# EAGLE board prismino (EAGLE 6.5.0)
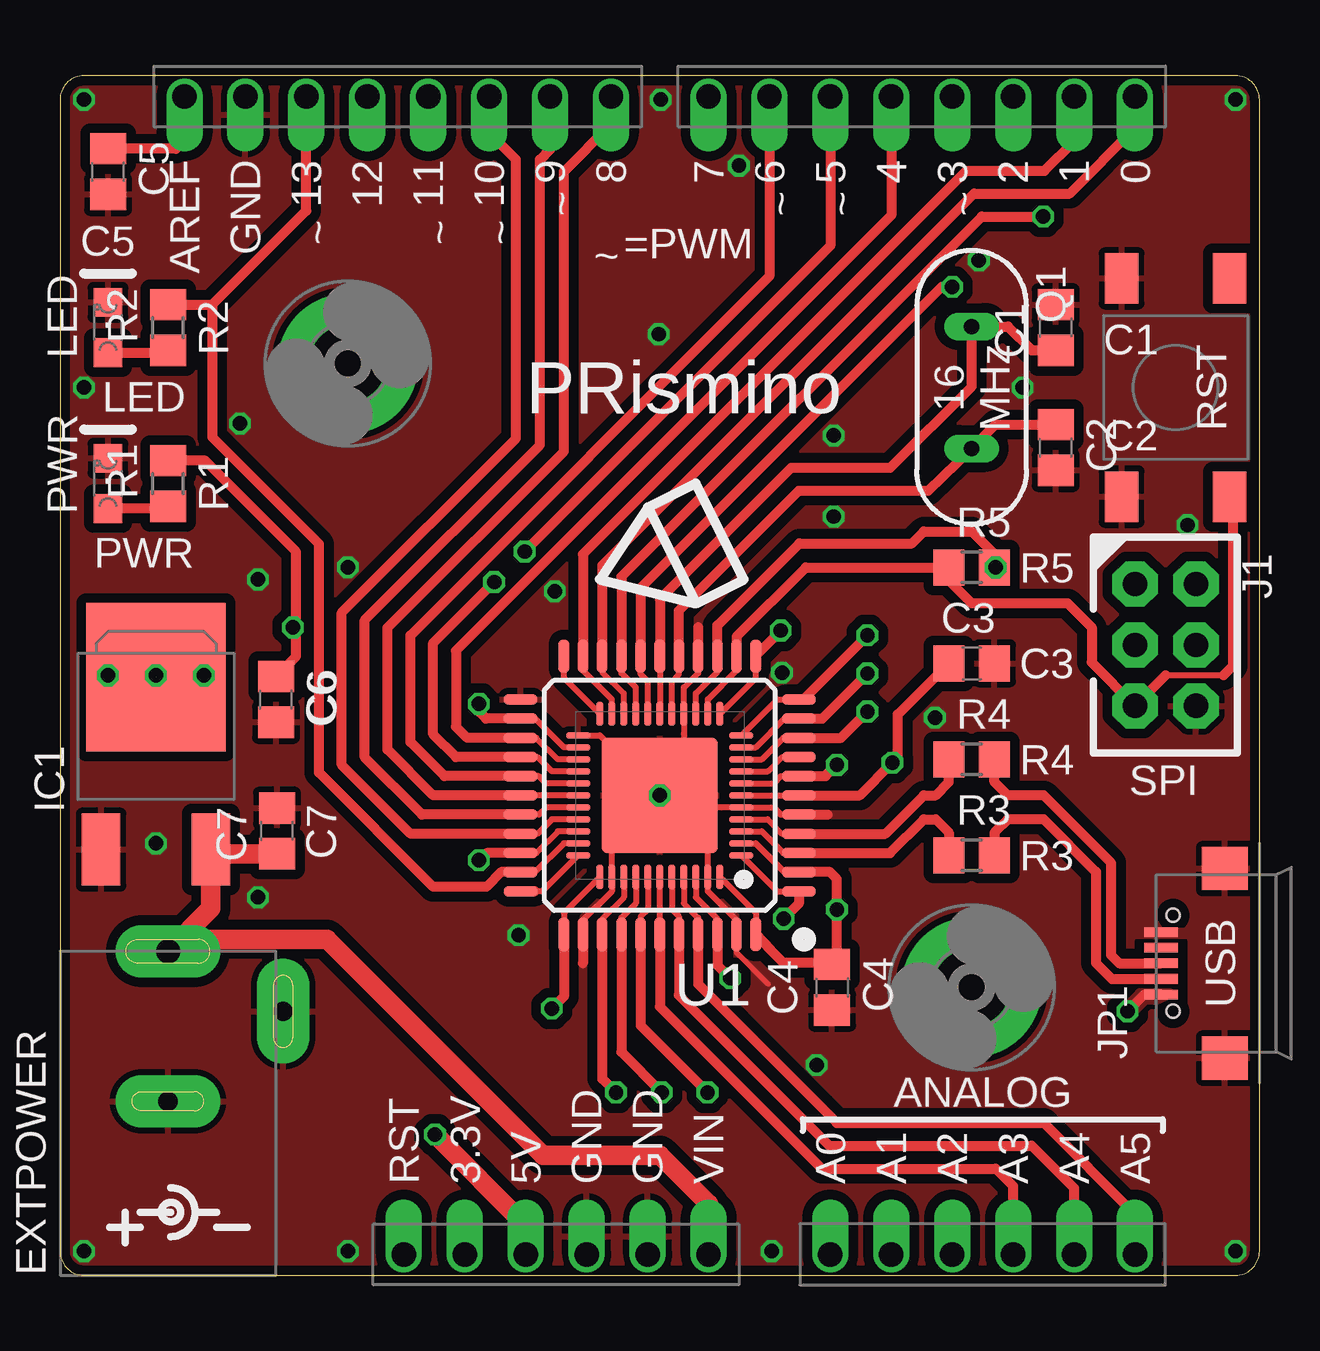
[diagram p0: board, top side]
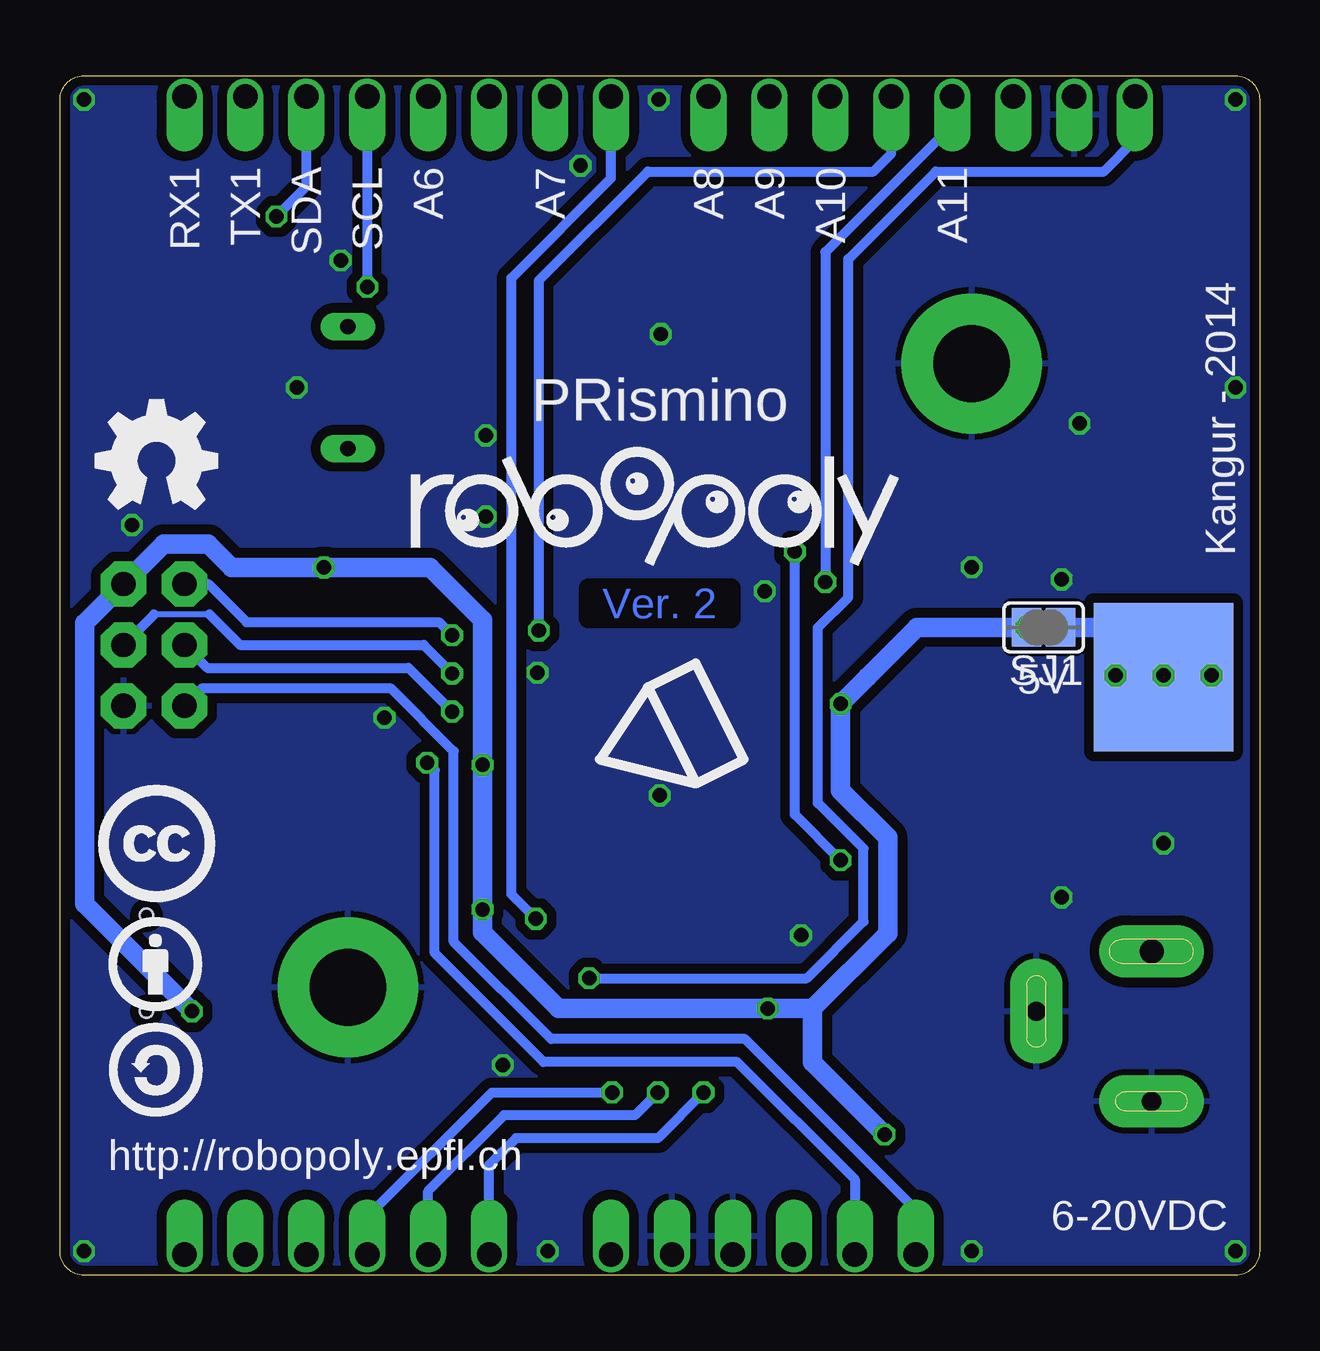
[diagram p1: board, bottom side, seen from below]

Size 50 x 50 mm. Coordinates in mm from the lower left corner, seen from the top.
Outline: 0,49 0,1 arc90 1,0 49,0 arc90 50,1 50,49 arc90 49,50 1,50 arc90 0,49
Copper layers (1*16): Top 0.035mm / dielectric 1.5mm / Bottom 0.035mm
Design rules "Fusion_eagle_rule_v1.1 *": minimum track width 6mil, minimum drill 12mil, track to track 6mil, track to pad 6mil, pad to pad 6mil, via to via 6mil, smd to smd 0mil, copper to edge 4mil, drill to drill 10mil, minimum pad ring 10mil, minimum via ring 6mil, stop-mask expansion 2mil, vias tented up to drill 100mil, thermal gap 10mil
Net classes: 2 gnd: width 0.254 mm, drill 0.61 mm, clearance 0.254 mm

## Footprints (pad centres in the part's own frame; a part is rotated, then mirrored left to right if it is on the bottom)
BUTTON = smd 1.4 x 2.1: 1 2.25,4.55; 2 2.25,-4.55; 3 -2.25,4.55; 4 -2.25,-4.55
C0805 = smd 1.3 x 1.5: 1 -0.95,0; 2 0.95,0
4UCON-18741 = drill 1 pad 2.184 long: 1 13.5,0 | drill 0.8 pad 2.184 long: 2 11,-4.8; 3 7.25,0
3,2-PAD = drill 3.2 pad 5.842: B3,2 0,0
DPACK_3 = smd 1.6 x 3: 1 -2.285,-4.08; 3 2.285,-4.08 | smd 5.8 x 6.2 bottom: HEATSINK 0,3.1 | smd 5.8 x 6.2: PAD 0,3.1
2X3-NOSILK-STACK = drill 1.016 pad 1.88 octagon: 1 -2.54,-1.27; 2 -2.54,1.27; 3 0,-1.27; 4 0,1.27; 5 2.54,-1.27; 6 2.54,1.27
USB-MICROB-4UCON = smd 0.4 x 1.4: D+ 0,4.1; D- -0.65,4.1; GND@1 1.3,4.1; ID 0.65,4.1; VBUS -1.3,4.1 | smd 1.8 x 1.9: GND@4 -3.95,1.45; GND@5 3.95,1.45 | hole 0.55: -2,3.6; 2,3.6
CHIPLED_0805 = smd 1.2 x 1.2: A 0,-1.05; C 0,1.05
ARDUINO-SMALL = drill 1.016 offset: 1 -10.668,-24.13; 2 -8.128,-24.13; 3 -5.588,-24.13; 4 -3.048,-24.13; 5 -0.508,-24.13; 6 2.032,-24.13; 7 7.112,-24.13; 8 9.652,-24.13; 9 12.192,-24.13; 10 14.732,-24.13; 11 17.272,-24.13; 12 19.812,-24.13; 13 19.812,24.13; 14 17.272,24.13; 15 14.732,24.13; 16 12.192,24.13; 17 9.652,24.13; 18 7.112,24.13; 19 4.572,24.13; 20 2.032,24.13; 21 -2.032,24.13; 22 -4.572,24.13; 23 -7.112,24.13; 24 -9.652,24.13; 25 -12.192,24.13; 26 -14.732,24.13; 27 -17.272,24.13; 28 -19.812,24.13
QS = drill 0.635 long: 1 -2.54,0; 2 2.54,0
R0805 = smd 1.3 x 1.5: 1 -0.95,0; 2 0.95,0
SJ = smd 1.219 x 1.6: 1 -0.711,0; 2 0.711,0
TQFP-44 = smd 1.4 x 0.45: 1 -5.8,4; 2 -5.8,3.2; 3 -5.8,2.4; 4 -5.8,1.6; 5 -5.8,0.8; 6 -5.8,0; 7 -5.8,-0.8; 8 -5.8,-1.6; 9 -5.8,-2.4; 10 -5.8,-3.2; 11 -5.8,-4; 23 5.8,-4; 24 5.8,-3.2; 25 5.8,-2.4; 26 5.8,-1.6; 27 5.8,-0.8; 28 5.8,0; 29 5.8,0.8; 30 5.8,1.6; 31 5.8,2.4; 32 5.8,3.2; 33 5.8,4 | smd 0.45 x 1.4: 12 -4,-5.8; 13 -3.2,-5.8; 14 -2.4,-5.8; 15 -1.6,-5.8; 16 -0.8,-5.8; 17 0,-5.8; 18 0.8,-5.8; 19 1.6,-5.8; 20 2.4,-5.8; 21 3.2,-5.8; 22 4,-5.8; 34 4,5.8; 35 3.2,5.8; 36 2.4,5.8; 37 1.6,5.8; 38 0.8,5.8; 39 0,5.8; 40 -0.8,5.8; 41 -1.6,5.8; 42 -2.4,5.8; 43 -3.2,5.8; 44 -4,5.8 | smd 1 x 0.275: 45 -3.4,2.5; 46 -3.4,2; 47 -3.4,1.5; 48 -3.4,1; 49 -3.4,0.5; 50 -3.4,0; 51 -3.4,-0.5; 52 -3.4,-1; 53 -3.4,-1.5; 54 -3.4,-2; 55 -3.4,-2.5; 67 3.4,-2.5; 68 3.4,-2; 69 3.4,-1.5; 70 3.4,-1; 71 3.4,-0.5; 72 3.4,0; 73 3.4,0.5; 74 3.4,1; 75 3.4,1.5; 76 3.4,2; 77 3.4,2.5 | smd 0.275 x 1: 56 -2.5,-3.4; 57 -2,-3.4; 58 -1.5,-3.4; 59 -1,-3.4; 60 -0.5,-3.4; 61 0,-3.4; 62 0.5,-3.4; 63 1,-3.4; 64 1.5,-3.4; 65 2,-3.4; 66 2.5,-3.4; 78 2.5,3.4; 79 2,3.4; 80 1.5,3.4; 81 1,3.4; 82 0.5,3.4; 83 0,3.4; 84 -0.5,3.4; 85 -1,3.4; 86 -1.5,3.4; 87 -2,3.4; 88 -2.5,3.4 | smd 4.826 x 4.826: EXP 0,0

## Placement (x,y rotation side)
BTN1  BUTTON  [BUTTON]  46.5,37 180 top
BY1  BYBOTTOM  [BY]  46,13 0 top
C1  22pF  [C0805]  41.5,39.5 90 top
C2  22pF  [C0805]  41.5,34.5 270 top
C3  1uF  [C0805]  38,25.5 0 top
C4  100nF  [C0805]  32.18,12 270 top
C5  100nF  [C0805]  2,46 270 top
C6  10uF  [C0805]  9,24 270 top
C7  10uF  [C0805]  9.04,18.52 90 top
EXTPOWER  4UCON-18741  [4UCON-18741]  4.5,0 90 top
H1  MOUNT-PAD-ROUND3.2  [3,2-PAD]  38,12 0 top
H2  MOUNT-PAD-ROUND3.2  [3,2-PAD]  12,38 0 top
IC1  NCP1117DT05BDTRKG  [DPACK_3]  4,21.82 0 top
J1  ISP-6PIN  [2X3-NOSILK-STACK]  46.08,26.27 270 top
JP1  USB4UCON  [USB-MICROB-4UCON]  50,13 90 top
LED  [CHIPLED_0805]  2,39.5 0 top
LICENCE1  LICENCECC-BOTTOM  [CREATIVE-COMMONS]  46,18 0 top
PIN1  ARDUINO-SMALL  [ARDUINO-SMALL]  25,25 0 top
PWR  [CHIPLED_0805]  2,33 0 top
Q1  16MHz  [QS]  38,37 270 top
R1  1K  [R0805]  4.5,33 90 top
R2  1K  [R0805]  4.5,39.5 90 top
R3  22R  [R0805]  38,17.5 0 top
R4  22R  [R0805]  38,21.5 0 top
R5  10K  [R0805]  38,29.5 0 top
SA1  SABOTTOM  [SA]  46,8.5 0 top
SJ1  [SJ]  9,27 180 bottom
U1  ATMEGA32U4  [TQFP-44]  25,20 180 top
U$1  PRISMINO  [PRISMINO-LOGO]  25,22.5 0 bottom
U$4  ROBOPOLY-LOGOBOTTOM-BIG  [ROBOPOLY-LOGO-BOTTOM-BIG]  25,31.75 0 top
U$5  OPEN-HARDWARE-LOGOBOTTOM-SMALL  [OPEN-HARDWARE-BOTTOM-SMALL]  46,34 0 top
U$7  PRISMINO  [PRISMINO-LOGO]  25,30 0 top

## Library data of the parts
BTN1 BY1 EXTPOWER H1 H2 IC1 J1 JP1 LICENCE1 PIN1 Q1 SA1 SJ1 U1 U$1 U$4 U$5 U$7 = robopoly
C1-C7 R1-R5 = rcl
LED PWR = led

## Nets
3V3: C3.1 PIN1.2 U1.6 U1.50
A0: PIN1.7 U1.36 U1.80
A1: PIN1.8 U1.37 U1.81
A2: PIN1.9 U1.38 U1.82
A3: PIN1.10 U1.39 U1.83
A4: PIN1.11 U1.40 U1.84
A5: PIN1.12 U1.41 U1.85
AREF: C5.1 PIN1.28 U1.42 U1.86
BOOTEN: U1.33 U1.77
D0: PIN1.13 U1.20 U1.64
D1: PIN1.14 U1.21 U1.65
D2: PIN1.15 U1.19 U1.63
D3: PIN1.16 U1.18 U1.62
D4: PIN1.17 U1.25 U1.69
D5: PIN1.18 U1.31 U1.75
D6: PIN1.19 U1.27 U1.71
D7: PIN1.20 U1.1 U1.45
D8: PIN1.21 U1.28 U1.72
D9: PIN1.22 U1.29 U1.73
D10: PIN1.23 U1.30 U1.74
D11: PIN1.24 U1.12 U1.56
D12: PIN1.25 U1.26 U1.70
D13: PIN1.26 R2.2 U1.32 U1.76
DM: R3.1 U1.3 U1.47
DP: R4.1 U1.4 U1.48
GND: BTN1.1 BTN1.2 C1.2 C2.2 C3.2 C4.2 C5.2 C6.2 C7.2 EXTPOWER.2 EXTPOWER.3 H1.B3,2 H2.B3,2 IC1.1 J1.6 JP1.GND@1 JP1.GND@4 JP1.GND@5 LED.C PIN1.4 PIN1.5 PIN1.27 PWR.C U1.5 U1.15 U1.23 U1.35 U1.43 U1.49 U1.59 U1.67 U1.79 U1.87 U1.EXP
MISO: J1.1 U1.11 U1.55
MOSI: J1.4 U1.10 U1.54
N$1: IC1.HEATSINK IC1.PAD SJ1.1
N$3: PWR.A R1.1
N$6: JP1.D- R3.2
N$7: JP1.D+ R4.2
N$11: LED.A R2.1
RESET: BTN1.3 J1.5 PIN1.1 R5.1 U1.13 U1.57
RXLED: U1.8 U1.52
SCK: J1.3 U1.9 U1.53
TXLED: U1.22 U1.66
VCC: C4.1 C6.1 J1.2 JP1.VBUS PIN1.3 R1.2 R5.2 SJ1.2 U1.2 U1.7 U1.14 U1.24 U1.34 U1.44 U1.46 U1.51 U1.58 U1.68 U1.78 U1.88
VIN: C7.1 EXTPOWER.1 IC1.3 PIN1.6
XTAL1: C1.1 Q1.1 U1.17 U1.61
XTAL2: C2.1 Q1.2 U1.16 U1.60

## Tracks (layer width: path | path; a pad name or v marks a point on that pad's centre or on a via)
3V3  (via drill 0.6)
  Top 0.254: U1.50 U1.6
  Top 0.406: U1.6 33.34,20 v34.7,21.36 34.92,21.59 34.92,23.38 C3.1
  Bottom 0.406: v34.7,21.36 34.38,21.05 34.38,13.43 29.84,8.89 21.77,8.89 16.87,3.99 PIN1.2
A0  (via drill 0.6)
  Top 0.254: U1.80 23.5,15.75 22.6,14.85 U1.36
  Top 0.406: 22.61,8.19 v23.18,7.62 22.6,8.2 U1.36
  Bottom 0.406: v23.18,7.62 25.08,5.71 31,5.71 32.11,4.6 PIN1.7
A1  (via drill 0.6)
  Top 0.254: U1.81 24,15.5 23.4,14.9 U1.37
  Top 0.406: 23.4,9.3 v25.08,7.62 | U1.37 23.4,9.3 | 23.4,9.3
  Bottom 0.406: v25.08,7.62 26.04,6.67 31.5,6.67 34.65,3.52 PIN1.8
A2  (via drill 0.6)
  Top 0.254: U1.82 24.5,15.25 24.2,14.95 U1.38
  Top 0.406: v26.99,7.62 24.2,10.41 U1.38
  Bottom 0.406: v26.99,7.62 32,7.62 37.19,2.43 PIN1.9
A3
  Top 0.254: U1.39 U1.83
  Top 0.406: U1.39 25,11.2 31.75,4.45 39,4.45 39.73,3.71 PIN1.10
A4
  Top 0.254: U1.84 25.5,15.25 25.8,14.95 U1.40
  Top 0.406: U1.40 25.8,11.69 25.79,11.68 32.07,5.4 40.5,5.4 42.27,3.63 PIN1.11
A5
  Top 0.254: U1.85 26,15.5 26.6,14.9 U1.41
  Top 0.406: U1.41 26.6,12.13 32.38,6.35 41,6.35 44.81,2.54 PIN1.12
AREF  (via drill 0.6)
  Top 0.254: U1.86 26.5,15.75 27.4,14.85 U1.42
  Top 0.406: 27.39,12.94 27.4,12.92 | 27.4,12.92 v27.94,12.38 | U1.42 27.4,12.92 | C5.1 4.83,46.95 5.19,47.31 PIN1.28
  Bottom 0.406: v27.94,12.38 18.87,12.38 16.51,14.74 16.51,17.78 18.41,19.68 18.41,26.99 17.14,28.26 17.14,42.35 13.5,46 6.5,46 5.19,47.31 PIN1.28
BOOTEN
  Top 0.254: U1.77 20.1,16 19.79,16
  Top 0.406: U1.33 19.79,16
D0
  Top 0.254: U1.64 23.5,24.25 22.6,25.15 U1.20
  Top 0.406: U1.20 22.6,29.59 38.1,45.09 42.09,45.09 44.81,47.81 PIN1.13
D1
  Top 0.254: U1.65 23,24 21.8,25.2 U1.21
  Top 0.406: U1.21 21.8,30.05 37.78,46.04 41.04,46.04 42.27,47.27 PIN1.14
D2  (via drill 0.6)
  Top 0.254: U1.63 24,24.5 23.4,25.1 U1.19
  Top 0.406: 23.4,29.11 38.42,44.13 v40.98,44.13 | 23.4,29.11 | 23.4,29.11 U1.19
  Bottom 0.406: PIN1.15 39.73,45.38 v40.98,44.13
D3  (via drill 0.6)
  Top 0.254: U1.62 24.5,24.75 24.2,25.05 U1.18
  Top 0.406: U1.18 24.2,28.64 36.75,41.19 v37.19,41.19
  Bottom 0.406: PIN1.16 v37.19,41.19
D4
  Top 0.254: U1.69 20.75,21.5 19.85,22.4 U1.25
  Top 0.406: U1.25 16.97,22.4 16.51,22.86 16.51,26.04 34.65,44.18 PIN1.17
D5  (via drill 0.6)
  Top 0.254: U1.75 20.75,18.5 19.85,17.6 U1.31
  Top 0.406: U1.31 17.79,17.6 v17.46,17.3 | v19.37,30.16 32.11,42.91 PIN1.18
  Bottom 0.406: v17.46,17.3 19.37,19.2 v19.37,30.16
D6
  Top 0.254: U1.71 20.25,20.5 19.95,20.8 U1.27
  Top 0.406: U1.27 16.03,20.8 14.61,22.23 14.61,26.67 29.57,41.64 PIN1.19
D7  (via drill 0.6)
  Top 0.254: U1.45 29.9,16 U1.1
  Top 0.406: U1.1 30.8,15.49 v30.16,14.86
  Bottom 0.406: v30.16,14.86 31.18,15.88 31.18,41.57 27.03,45.72 PIN1.20
D8
  Top 0.254: U1.72 U1.28
  Top 0.406: U1.28 15.56,20 13.65,21.91 13.65,26.99 21,34.34 21,46 22.97,47.97 PIN1.21
D9
  Top 0.254: U1.73 20.25,19.5 19.95,19.2 U1.29
  Top 0.406: U1.29 15.09,19.2 12.7,21.59 12.7,27.3 20,34.6 20,46.5 20.43,46.93 PIN1.22
D10
  Top 0.254: U1.74 20.5,19 19.9,18.4 U1.30
  Top 0.406: U1.30 14.94,18.4 | 14.94,18.4 | 14.94,18.4 14.62,18.4 11.75,21.27 11.75,27.62 19,34.88 19,46.5 18.91,46.59 18.25,47.25 17.89,47.61 PIN1.23
D11  (via drill 0.6)
  Top 0.254: U1.56 29,24.9 U1.12
  Top 0.406: v30.05,26.87 29,25.82 U1.12
  Bottom 0.406: v30.05,26.87 30.05,41.45 25.5,46 16.1,46 15.35,46.75 PIN1.24
D12  (via drill 0.6)
  Top 0.254: U1.70 20.5,21 19.9,21.6 U1.26
  Top 0.406: U1.26 16.5,21.6 15.56,22.54 15.56,26.35 v18.1,28.89
  Bottom 0.406: v18.1,28.89 18.1,42.65 12.81,47.94 PIN1.25
D13
  Top 0.254: U1.76 21,18 19.8,16.8 U1.32
  Top 0.406: 6.35,40.45 6.35,34.92 10.79,30.48 10.79,20.95 15.56,16.19 17.78,16.19 18.39,16.8 U1.32 | PIN1.26 10.27,44.37 6.35,40.45 | R2.2 6.35,40.45
DM
  Top 0.254: U1.47 29.25,18.5 30.15,17.6 U1.3
  Top 0.406: U1.3 34.6,17.6 36,19 36.5,19 37.05,18.45 R3.1
DP
  Top 0.254: U1.48 29.5,19 30.1,18.4 U1.4
  Top 0.406: U1.4 34.4,18.4 36,20 36.5,20 37.05,20.55 R4.1
GND  (via drill 0.6)
  Top 0.203: 29.53,12.13 28.19,13.46 28.19,14.22
  Top 0.254: U1.43 28.2,14.8 27,16 U1.87 27,18 U1.EXP | U1.5 30.05,19.2 29.75,19.5 U1.49 25.5,19.5 U1.EXP | U1.35 21.8,14.8 23,16 U1.79 23,18 U1.EXP | U1.15 26.6,25.1 26,24.5 U1.59 26,21 U1.EXP | U1.67 22.5,22.5 U1.EXP
  Top 0.406: 21.8,14 21.8,13 | 31,19.2 32,19.2 | 26.6,27 26.6,26
  other vias: 25.04,49 32.25,35 19.11,14.17 24.96,39.23 36.47,23.24 1,37 1,1 12,1 1,49 7.5,35.5 12,29.51 49,1 49,49 38.3,42.3 47,31.27 25,20 29.66,1 32.25,31.62 20.62,28.51 30.1,25.12 40.12,37 31.54,8.76 4,18 28.3,46.25 8.25,29 8.25,15.75
  pour Top (isolate 0.406): 49,0 1,0 arc-90 0,1 0,49 arc-90 1,50 49,50 arc-90 50,49 50,1 arc-90
  pour Bottom (isolate 0.406): 49,0 1,0 arc-90 0,1 0,49 arc-90 1,50 49,50 arc-90 50,49 50,1 arc-90
  pour Top (no thermals): 47,14.38 47,14.12 44.75,14.12 44.75,15 45.5,15 45.62,14.75 45.88,14.38
MISO  (via drill 0.6)
  Top 0.254: U1.55 29.9,24 U1.11
  Top 0.406: U1.11 30.98,24 v33.66,26.67
  Bottom 0.406: v33.66,26.67 34.21,27.22 42.22,27.22 43.81,28.81 J1.1
MOSI  (via drill 0.6)
  Top 0.254: U1.54 29,22 30.2,23.2 U1.10
  Top 0.406: U1.10 31.77,23.2 v33.66,25.08
  Bottom 0.254: 43.77,27.54 46.08,27.54
  Bottom 0.406: v33.66,25.08 34.84,26.27 42.5,26.27 43.77,27.54 | J1.4 46.08,27.54
N$1  (1 unrouted)
  Bottom 0.813: SJ1.1 6.08,27 IC1.PAD
N$2  (via drill 0.6)
  other vias: 2,25
N$3
  Top 0.406: R1.1 4.4,31.95 PWR.A
N$4  (via drill 0.6)
  other vias: 4,25
N$5  (via drill 0.6)
  other vias: 6,25
N$6
  Top 0.406: JP1.D- 43.85,12.35 43.18,13.02 43.18,16.82 41,19 39.5,19 38.95,18.45 R3.2
N$7
  Top 0.406: JP1.D+ 44.15,13 43.81,13.34 43.81,17.18 41,20 39.5,20 38.95,20.55 R4.2
N$11
  Top 0.406: LED.A 4.5,38.45 R2.1
RESET
  Top 0.254: 48.49,25 46.08,25 | U1.57 27,24 28.2,25.2 U1.13
  Top 0.406: 48.49,25 48.9,25.4 48.9,32.3 BTN1.3 | 46.08,25 J1.5 43,25.54 43,27 42,28 38,28 37.05,28.95 R5.1 31.09,29.5 28.2,26.61 U1.13
  Bottom 0.406: PIN1.1 14.33,2.72 21.45,9.84 29.53,9.84 33.59,13.9 33.59,21.84 36.2,24.45 44.09,24.45 J1.5
RXLED
  Top 0.254: U1.52 29.5,21 30.1,21.6 U1.8
SCK  (via drill 0.6)
  Top 0.254: U1.53 29.25,21.5 30.15,22.4 U1.9
  Top 0.406: U1.9 32.56,22.4 v33.66,23.5
  Bottom 0.406: v33.66,23.5 35.48,25.32 43.86,25.32 J1.3
TXLED
  Top 0.254: U1.66 21,24.9 U1.22
VCC  (via drill 0.6)
  Top 0.254: U1.88 29,15.1 U1.44 | U1.2 30.2,16.8 29,18 U1.46 28.99,18 30.16,16.83 30.8,16.83 | U1.78 21,15.1 U1.34 | U1.24 19.8,23.2 21,22 U1.68 | U1.58 26.5,24.25 27.4,25.15 U1.14 | U1.51 29.75,20.5 30.05,20.8 U1.7
  Top 0.406: 38.95,29.95 R5.2 | R5.2 38.95,30.05 38,31 36,31 35.5,30.5 30.82,30.5 27.4,27.08 U1.14 | U1.24 17.76,23.2 17.46,23.5 v17.46,23.81 | 29,14.18 U1.44 29.64,13.54 30.16,13.02 32.34,13.02 32.38,13.06 | U1.7 31.91,20.8 v32.38,21.27 | C4.1 32.38,13.06 | 32.38,13.06 v32.38,15.24 32.38,16.51 32.09,16.8 U1.2 | R1.2 6.05,33.95 9.84,30.16 9.84,26.87 | U1.34 21,11.61 v20.5,11.11 | JP1.VBUS 45.2,11.7 v44.5,11 | v39,29.5 R5.2 | C6.1 9.84,25.79 9.84,26.87 | 9.84,26.87 arc90 SJ1.2
  Top 0.813: v15.63,5.87 19.41,2.09 PIN1.3
  Bottom 0.406: SJ1.2 11,27
  Bottom 0.813: 16.35,24.93 v17.46,23.81 | v17.46,23.81 17.46,20.21 15.5,18.25 15.5,14.25 18.64,11.11 | 18.64,11.11 v20.5,11.11 29.21,11.11 32.38,14.29 v32.38,15.24 v32.38,21.27 32.38,27.3 34.58,29.5 v39,29.5 42.84,29.5 43.81,30.48 45.68,30.48 J1.2 48.98,27.18 48.98,15.48 v44.5,11 | v15.63,5.87 18.64,8.87 18.64,11.11 | 9.75,27 11,27 14.28,27 v17.46,23.81
  other vias: 9.71,27
  pour Top (no thermals): 46.25,11.75 45,11.75 44.5,11.25 44.75,11 45.25,11.5 45.75,11.5
VIN
  Top 0.813: PIN1.6 27.03,2.97 25,5 20.13,5 11.13,14 5,14 EXTPOWER.1 6.29,15.29 IC1.3 6.29,17.57 C7.1
XTAL1
  Top 0.254: U1.17 U1.61
  Top 0.406: U1.17 25,28.18 30.48,33.66 34.61,33.66 38,37.05 Q1.1 39.52,39.54 40.51,38.55 C1.1
XTAL2
  Top 0.254: U1.60 25.5,24.75 25.8,25.05 U1.16
  Top 0.406: U1.16 25.8,27.7 30.8,32.7 36.2,32.7 Q1.2 38.99,35.45 C2.1

## Text on the board
Bottom: Ver. 2
tPlace: AREF | GND | 13 | 12 | 11 | 10 | 9 | 8 | 7 | 6 | 5 | 4 | 3 | 2 | 1 | 0 | ~ | ~ | ~ | ~ | C5 | ~ | ~ | ~ | =PWM | ~ | R2 | C1 | LED | PRismino | 16 / MHz | RST | C2 | R1 | PWR | R5 | C3 | C6 | R4 | SPI | C7 | R3 | USB | C4 | ANALOG | RST | 3.3V | 5V | GND | GND | VIN | A0 | A1 | A2 | A3 | A4 | A5
bPlace: A11 | A10 | A9 | A8 | A7 | A6 | SCL | SDA | TX1 | RX1 | PRismino | Kangur - 2014 | 5V | http://robopoly.epfl.ch | 6-20VDC
Document: PRismino | Version: 2 | http://robopoly.epfl.ch | 2014-07-24 | Licence: CC-BY-SA